# Altium PCB V2_0.PcbDoc
Units mm, origin at the board's own origin, x right, y up, seen from the top; angles counter-clockwise.
Board outline 38.46 x 78.49 mm, 4 copper layers (Top Layer, VCC, GND, Bottom Layer), stack 0.603 mm thick; 21 components, 19 nets, 145 pads, 0 vias.
Unrouted connection lines stored in the file: 49.
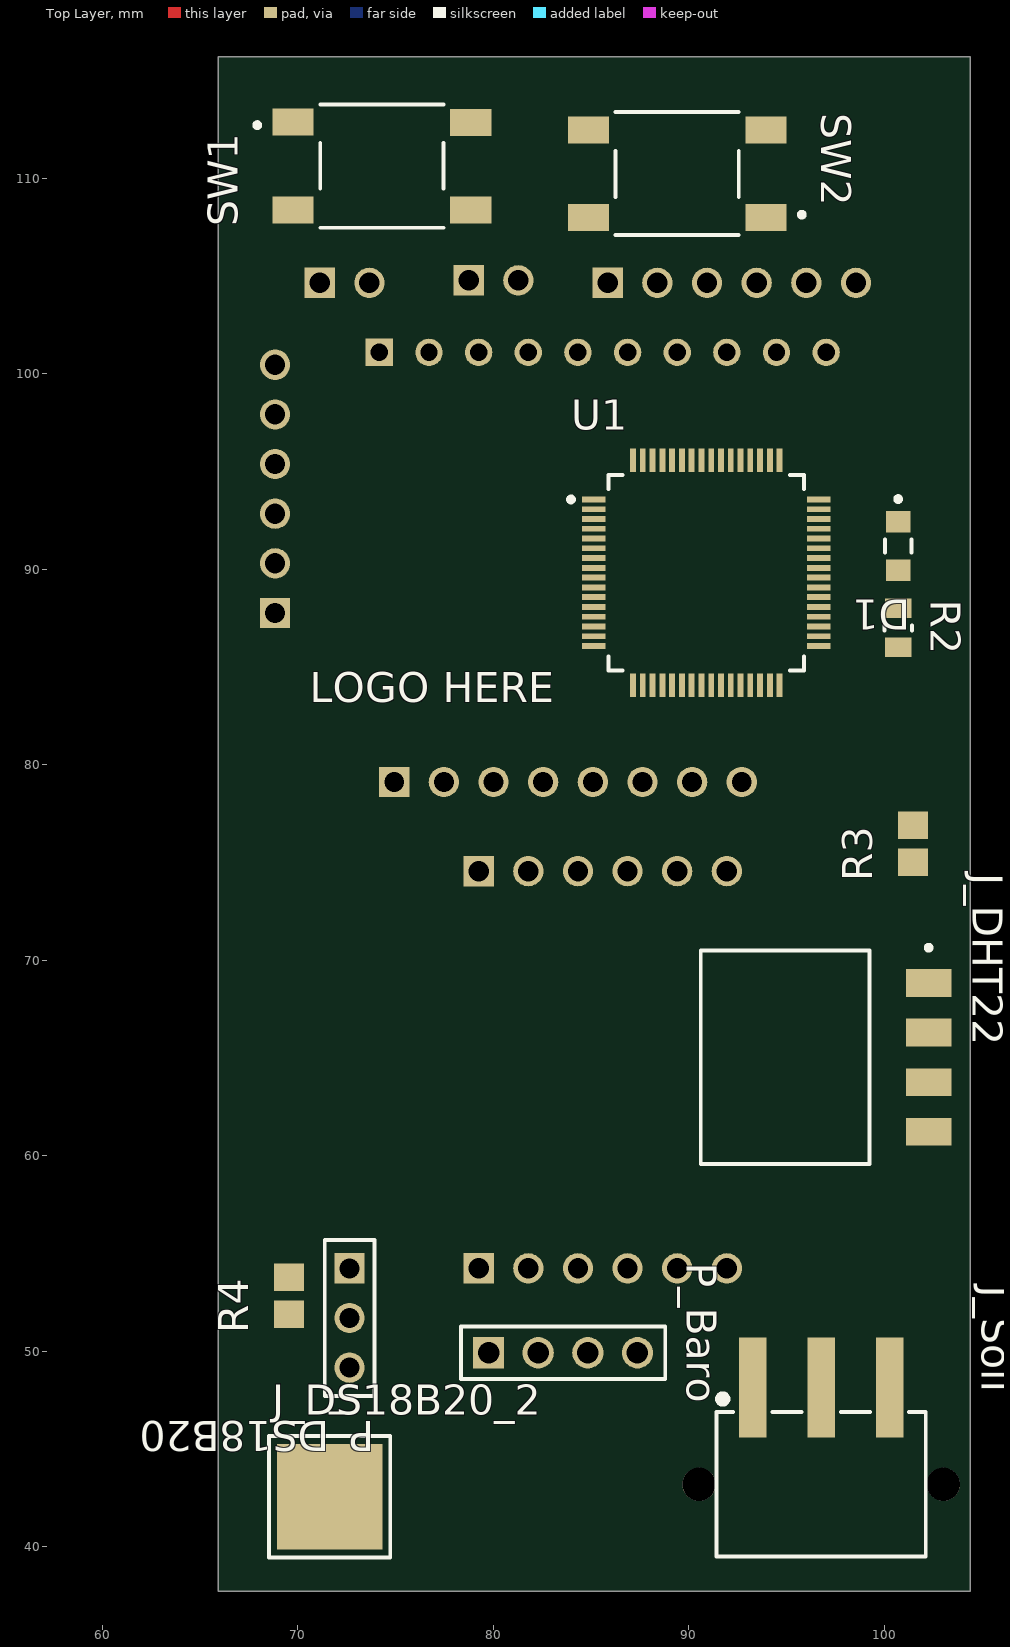
[diagram p0: Top Layer view]
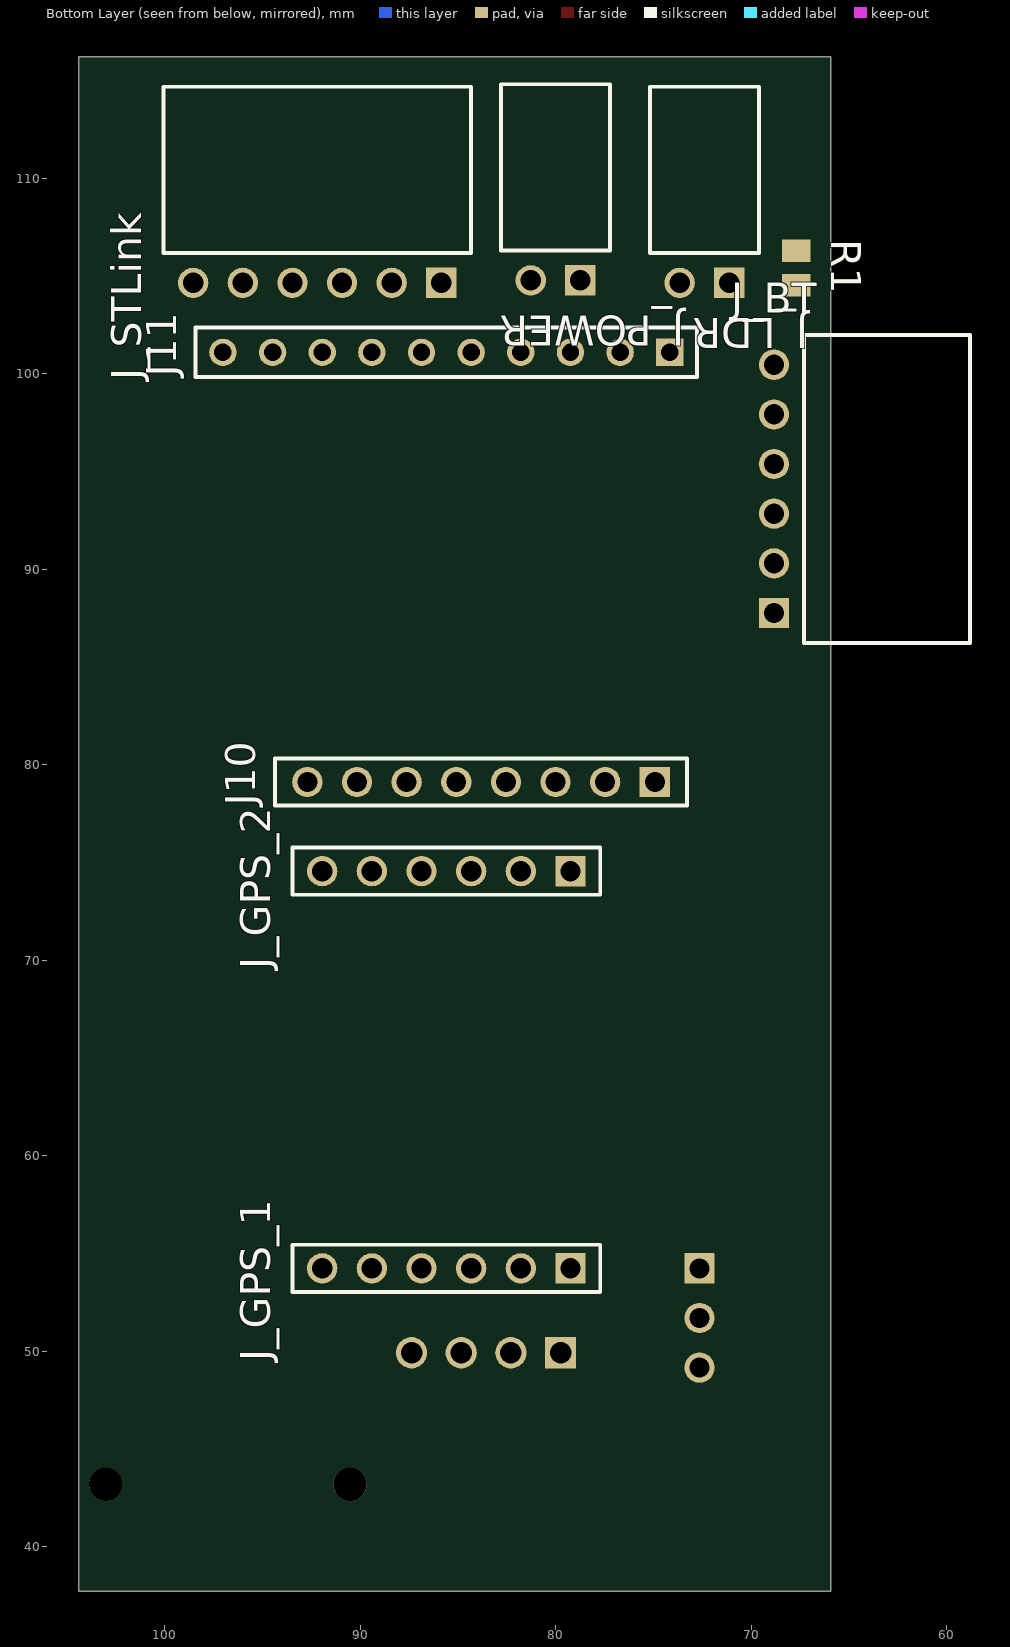
[diagram p1: Bottom Layer view, seen from below]
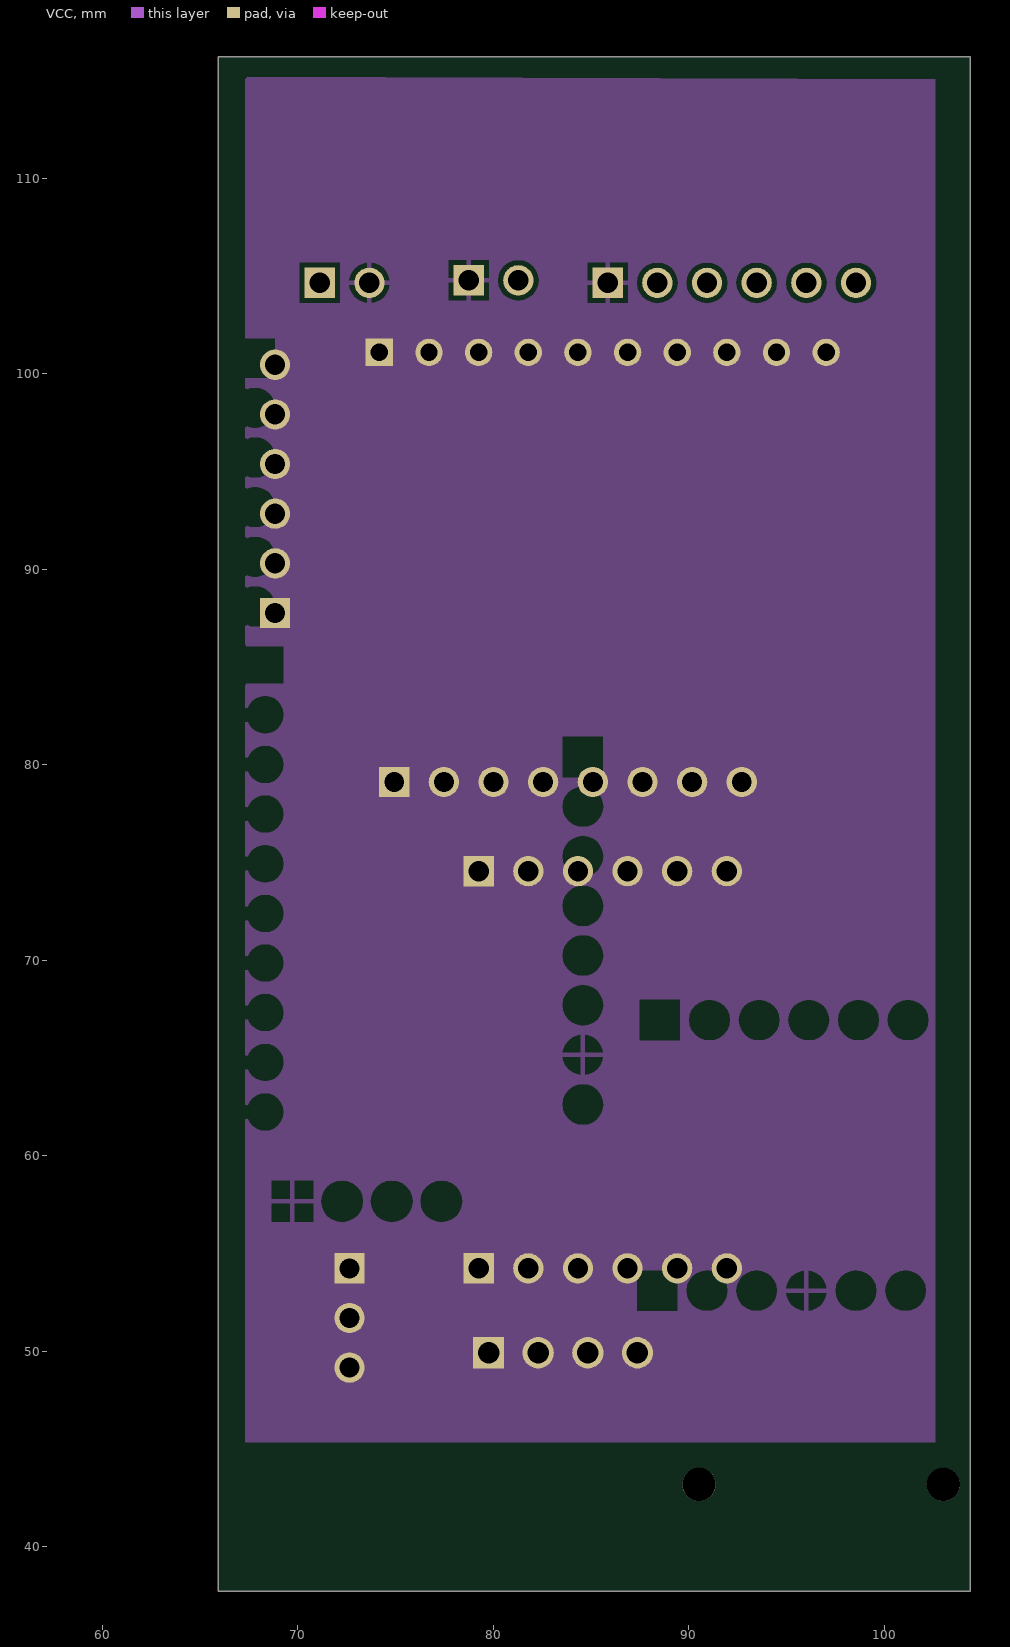
[diagram p2: VCC]
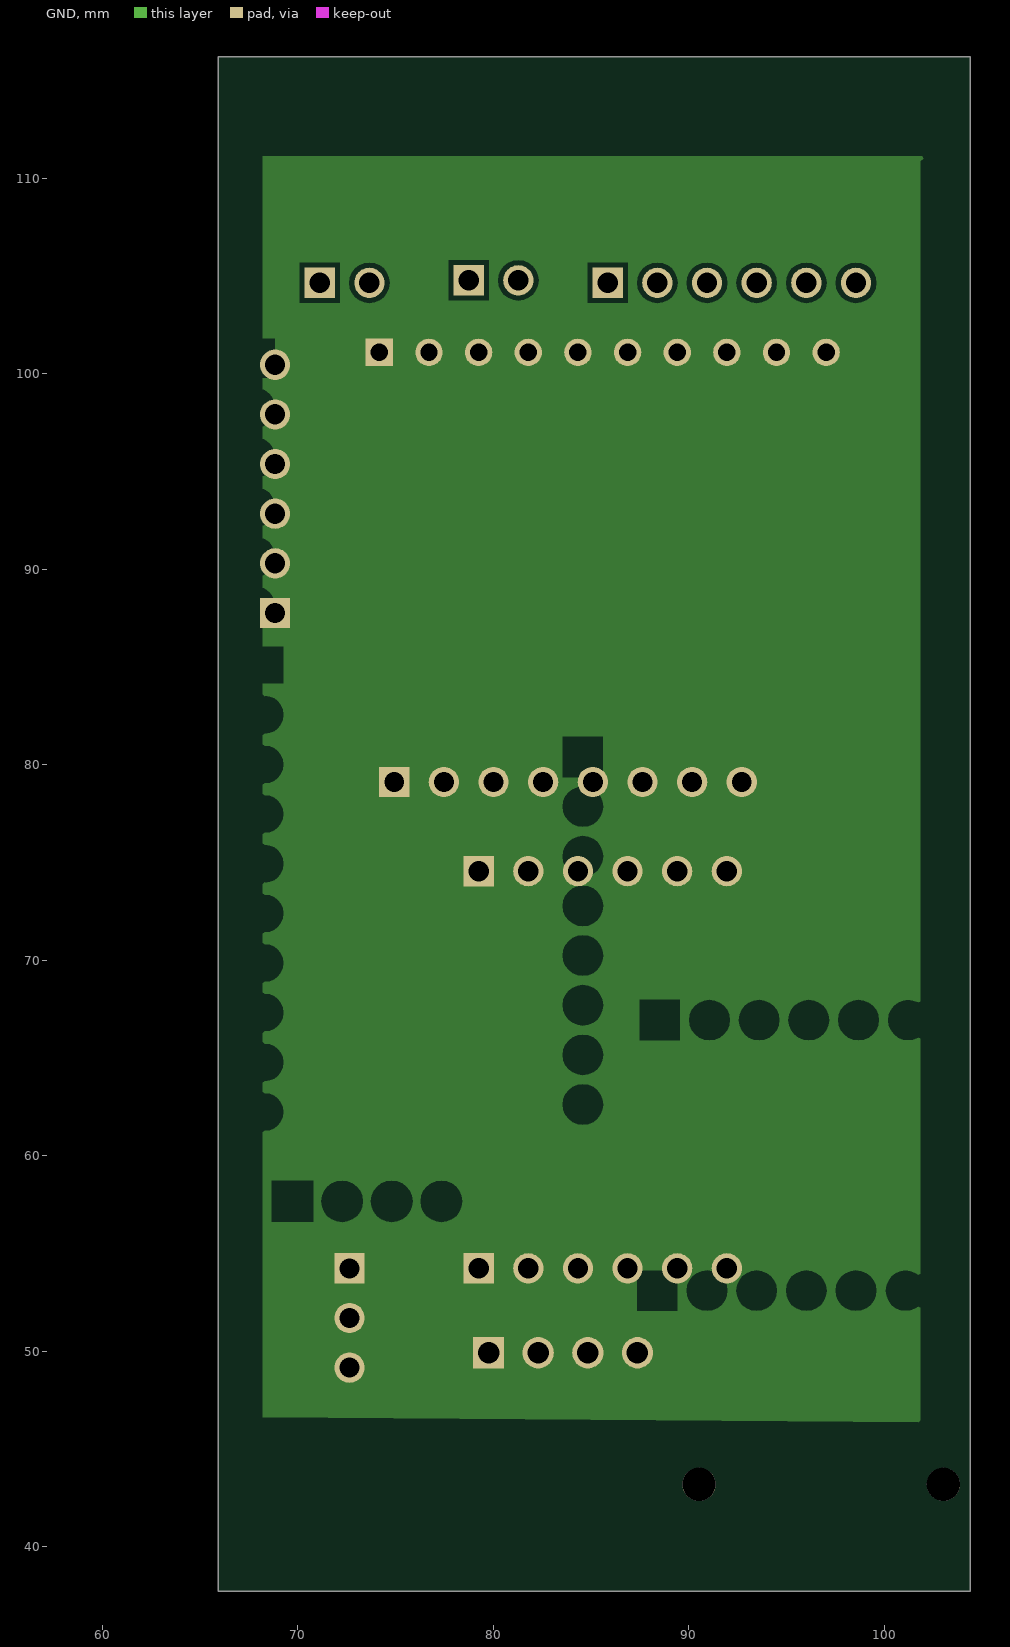
[diagram p3: GND]

## Layer stack, top to bottom
Top Solder: solder mask 0.0102, Solder Resist, Dk 3.5
Top Layer: signal copper 0.0356
Dielectric 2: prepreg 0.0711, PP-006, Dk 4.1
VCC: signal copper 0.035
Dielectric 1: dielectric 0.32, FR-4, Dk 4.8
GND: signal copper 0.035
Dielectric 3: prepreg 0.0711, PP-006, Dk 4.1
Bottom Layer: signal copper 0.0356
Bottom Solder: solder mask 0.0102, Solder Resist, Dk 3.5

## Board outline
104.394,116.205 104.394,37.719 65.939,37.719 65.939,116.205

## Design rules (kind name [scope] priority, off if disabled: settings)
Clearance [All] p1: gap=0.254 ignorepadtopadclearanceinfootprint=TRUE except(0: Arc-Hole Track-Hole SMDPad-Hole THPad-Hole Via-Hole Fill-Hole Poly-Hole Region-Hole Text-Hole)
PolygonConnect [All] p1: connectstyle=Relief reliefconductorwidth=0.254 reliefentries=4 polygonreliefangle="90 Angle" airgapwidth=0.254
RoomDefinition V2_0 [InComponentClass('V2_0')] p1 off: confinementstyle=ConfineIn formatcopy=TRUE lockcomponents=FALSE outline 62.23,38.608 22.098,38.608 22.098,66.802 62.23,66.802
RoutingVias [All] p1: holewidth=0.711 width=1.27 viastyle="Through Hole" minholewidth=0.711 minwidth=1.27 maxholewidth=0.711 maxwidth=1.27
SolderMaskExpansion [All] p1: expansion=0.102 istentingtop=FALSE
Width [All] p1: maxlimit=0.254 minlimit=0.254 preferedwidth=0.254
30 further rules are at their usual default settings.

## Components (designator, comment, footprint, x,y, rotation, side; value= is the part's Value field where it differs from the comment)
D1 "LTST-C171KGKT" FP-LTST-C171KGKT-MFG 100.711,91.186 r270 top
J10 "SSQ-108-01-T-S" SMTC-SSQ-108-01-X-S 74.93,79.11 r0 bottom
J11 "BCS-110-F-S-TE" SMTC-BCS-110-X-S-TE 74.168,101.092 r0 bottom
J_BT "SSW-106-02-G-S-RA" SMTC-SSW-106-02-X-S-RA 68.834,87.757 r90 bottom
J_DHT22 "SMH-104-02-G-S" FP-SMH-104-02-G-S-MFG 94.996,65.024 r270 top
J_DS18B20_2 "S8111-46R" FP-S8111-46R-MFG 71.628,42.545 r90 top
J_GPS_1 "SSW-106-02-T-S" SMTC-SSW-106-02-X-S 79.248,54.229 r0 bottom
J_GPS_2 "SSW-106-02-T-S" SMTC-SSW-106-02-X-S 79.248,74.549 r0 bottom
J_LDR "SSW-102-02-G-S-RA" SMTC-SSW-102-02-X-S-RA 71.12,104.648 r0 bottom
J_POWER "SSW-102-02-G-S-RA" SMTC-SSW-102-02-X-S-RA 78.74,104.775 r0 bottom
J_Soil "691508110303" 691508110303 96.774,43.18 r0 top
J_STLink "SSW-106-02-G-S-RA" SMTC-SSW-106-02-X-S-RA 85.852,104.648 r0 bottom
P_Baro "61300411121" 61300411121 83.566,49.911 r0 top
P_DS18B20 "TSW-103-07-G-S" SMTC-TSW-103-07-X-S 72.644,54.229 r270 top
R1 "ERJ6ENF2200V" RESC2013X70X40NL20T20 67.691,105.41 r270 bottom
R2 "RP73PF2A499RBTDF" FP-RP73P-2A-MFG 100.711,86.995 r270 top value=499Ω
R3 "ERA6AEB472V" RESC2013X60X40ML20T25 101.473,75.946 r90 top
R4 "ERA6AEB472V" RESC2013X60X40ML20T25 69.545,52.832 r90 top
SW1 "FSM2JSMAA" FP-FSM2JSMAA-MFG 74.295,110.617 r90 top
SW2 "FSM2JSMAA" FP-FSM2JSMAA-MFG 89.408,110.236 r270 top
U1 "STM32L073RZT6" FP-LQFP64-5W-MFG 90.897,89.817 r0 top

## Footprints (in the part's own frame and the unit in brackets; to place one, negate y for a bottom-side part, rotate by r counter-clockwise, add the part's x,y. Pads: shape width x height; smd on the part's side, far side on the other; paste and mask are expansions set on the pad)
61300411121 [mm] "Pin Header, pitch 2.54 mm, THT, Vertical, single row, 4p"
  rect 1.6x1.6 hole 1.1: 1(-3.81,0)
  round 1.6 hole 1.1: 2(-1.27,0) 3(1.27,0) 4(3.81,0)
  silkscreen extent -5.23,-1.35 5.23,1.35, body extent -5.08,-1.27 5.08,1.27, height 8.57
691508110303 [mm] "WR-TBL Terminal block - serie 5081 3,50mm - SMT - Horizontal entry with rising clamp - 03p"
  rect 1.4x5.1 smd: 1(-3.5,4.95) 2(0,4.95) 3(3.5,4.95)
  round 1.7 hole 1.7 unplated: M1(-6.25,0) M2(6.25,0)
  silkscreen extent -5.35,-3.7 5.35,4.51, body extent -6.92,-3.7 6.92,7.2, height 11.25
FP-FSM2JSMAA-MFG [mm]
  rect 1.38x2.1 smd paste+0 mask+0: 1(2.25,4.55) 2(2.24,-4.55) 3(-2.24,4.55) 4(-2.24,-4.55)
  silkscreen extent -3.15,-3.15 3.15,6.5, body extent -3.25,-5.7 3.25,5.7, height 0.25
FP-LQFP64-5W-MFG [mm]
  rect 1.2x0.3 smd paste+0 mask+0: 1(-5.75,3.75) 2(-5.75,3.25) 3(-5.75,2.75) 4(-5.75,2.25) 5(-5.75,1.75) 6(-5.75,1.25) 7(-5.75,0.75) 8(-5.75,0.25) 9(-5.75,-0.25) 10(-5.75,-0.75) 11(-5.75,-1.25) 12(-5.75,-1.75) 13(-5.75,-2.25) 14(-5.75,-2.75) 15(-5.75,-3.25) 16(-5.75,-3.75) 33(5.75,-3.75) 34(5.75,-3.25) 35(5.75,-2.75) 36(5.75,-2.25) 37(5.75,-1.75) 38(5.75,-1.25) 39(5.75,-0.75) 40(5.75,-0.25) 41(5.75,0.25) 42(5.75,0.75) 43(5.75,1.25) 44(5.75,1.75) 45(5.75,2.25) 46(5.75,2.75) 47(5.75,3.25) 48(5.75,3.75)
  rect 0.3x1.2 smd paste+0 mask+0: 17(-3.75,-5.75) 18(-3.25,-5.75) 19(-2.75,-5.75) 20(-2.25,-5.75) 21(-1.75,-5.75) 22(-1.25,-5.75) 23(-0.75,-5.75) 24(-0.25,-5.75) 25(0.25,-5.75) 26(0.75,-5.75) 27(1.25,-5.75) 28(1.75,-5.75) 29(2.25,-5.75) 30(2.75,-5.75) 31(3.25,-5.75) 32(3.75,-5.75) 49(3.75,5.75) 50(3.25,5.75) 51(2.75,5.75) 52(2.25,5.75) 53(1.75,5.75) 54(1.25,5.75) 55(0.75,5.75) 56(0.25,5.75) 57(-0.25,5.75) 58(-0.75,5.75) 59(-1.25,5.75) 60(-1.75,5.75) 61(-2.25,5.75) 62(-2.75,5.75) 63(-3.25,5.75) 64(-3.75,5.75)
  silkscreen extent -7.05,-5 5,5, body extent -6.45,-6.45 6.45,6.45, height 0.25
FP-LTST-C171KGKT-MFG [mm]
  rect 1.1x1.25 smd paste+0 mask+0: 1(-1.25,0) 2(1.25,0)
  silkscreen extent -2.52,-0.67 0.33,0.67, body extent -1.9,-0.77 1.9,0.77, height 0.25
FP-RP73P-2A-MFG [mm]
  rect 1x1.35 smd paste+0 mask+0: 1(-1,0) 2(1,0)
  silkscreen extent -0.13,-0.7 0.13,0.7, body extent -1.6,-0.8 1.6,0.8, height 0.25
FP-S8111-46R-MFG [mm]
  rect 5.4x5.4 smd paste+0 mask+0: 1(0,0)
  silkscreen extent -3.1,-3.1 3.1,3.1, body extent -2.8,-2.8 2.8,2.8, height 0.25
FP-SMH-104-02-G-S-MFG [mm]
  rect 1.42x2.34 smd paste+0 mask+0: 1(-3.81,7.275) 2(-1.27,7.275) 3(1.27,7.275) 4(3.81,7.275)
  silkscreen extent -5.73,-4.39 5.46,7.4, body extent -5.33,-4.25 5.33,7.68, height 2.54
RESC2013X60X40ML20T25 [mm] "Chip Resistor, 2-Leads, Body 2.00x1.25mm, IPC Low Density"
  rect 1.4x1.55 smd: 1(-0.95,0) 2(0.95,0)
  body extent -1.1,-0.72 1.1,0.72, height 0.6
RESC2013X70X40NL20T20 [mm] "Chip Resistor, 2-Leads, Body 2.00x1.25mm, IPC Medium Density"
  rect 1.15x1.45 smd: 1(-0.875,0) 2(0.875,0)
  body extent -1.1,-0.72 1.1,0.72, height 0.7
SMTC-BCS-110-X-S-TE [mm] "Box Connector Socket Strip, 1x10 Pins, Vertical, 2.54mm Pitch, Female"
  rect 1.4x1.4 hole 0.89: 1(0,0)
  round 1.4 hole 0.89: 2(2.54,0) 3(5.08,0) 4(7.62,0) 5(10.16,0) 6(12.7,0) 7(15.24,0) 8(17.78,0) 9(20.32,0) 10(22.86,0)
  silkscreen extent -1.4,-1.27 24.26,1.27, body extent -1.27,-1.27 24.13,1.27, height 7.37
SMTC-SSQ-108-01-X-S [mm] "SQ Post Socket, 1x8 Pins, Vertical, 2.54mm Pitch, Female"
  rect 1.55x1.55 hole 1.02: 1(0,0)
  round 1.55 hole 1.02: 2(2.54,0) 3(5.08,0) 4(7.62,0) 5(10.16,0) 6(12.7,0) 7(15.24,0) 8(17.78,0)
  silkscreen extent -1.65,-1.2 19.43,1.2, body extent -1.52,-1.21 19.3,1.21, height 8.51
SMTC-SSW-102-02-X-S-RA [mm] "SQ Post Socket, 1x2 Pins, Right Angle, 2.54mm Pitch, Female"
  rect 1.55x1.55 hole 1.04: 1(0,0)
  round 1.55 hole 1.04: 2(2.54,0)
  silkscreen extent -1.53,-10.03 4.07,-1.52, body extent -1.52,-10.03 4.06,0.2, height 2.41
SMTC-SSW-106-02-X-S [mm] "SQ Post Socket, 1x6 Pins, Vertical, 2.54mm Pitch, Female"
  rect 1.55x1.55 hole 1.04: 1(0,0)
  round 1.55 hole 1.04: 2(2.54,0) 3(5.08,0) 4(7.62,0) 5(10.16,0) 6(12.7,0)
  silkscreen extent -1.53,-1.2 14.23,1.2, body extent -1.52,-1.21 14.22,1.21, height 8.51
SMTC-SSW-106-02-X-S-RA [mm] "SQ Post Socket, 1x6 Pins, Right Angle, 2.54mm Pitch, Female"
  rect 1.55x1.55 hole 1.04: 1(0,0)
  round 1.55 hole 1.04: 2(2.54,0) 3(5.08,0) 4(7.62,0) 5(10.16,0) 6(12.7,0)
  silkscreen extent -1.53,-10.03 14.23,-1.52, body extent -1.52,-10.03 14.22,0.2, height 2.41
SMTC-TSW-103-07-X-S [mm] ".025 SQ Post Terminal Strip Assembly, 1x3 Pins, Vertical, 2.54mm Pitch, Male"
  rect 1.55x1.55 hole 1.02: 1(0,0)
  round 1.55 hole 1.02: 2(2.54,0) 3(5.08,0)
  silkscreen extent -1.46,-1.27 6.54,1.27, body extent -1.27,-1.27 6.35,1.27, height 8.38

## Part data
D1: library part CMP-22017-000037-1, "LED GREEN CLEAR SMD", Case Code (Imperial)=0805, Case Code (Metric)=2012, Color=Green, Forward Current=30mA, Forward Voltage=2.4V, Lens Color=Colorless, Max Operating Temperature=85°C, Min Operating Temperature=-55°C, Package Quantity=1, Power Dissipation=75mW, Reverse Voltage=5V, Test Current=20mA, Case/Package=0805, Depth=1.25mm, Dominant Wavelength=571nm, HEIGHT=0.8mm, Illumination Color=Green, Lead Free="Lead Free", Length=2mm, Lens Style=Rectangular, Lens Transparency=Clear, Luminous Intensity=35mcd, Mount="Surface Mount", Number of Elements=1, Number of LEDs=1, Number of Pins=2, Packaging="Tape and Reel", Power Rating=75mW, Radiation Hardening=No, Viewing Angle=130°, Wavelength=574nm, Width=1.25mm
J10: library part CMP-1023-00293-1, "SQ Post Socket, Through-hole, Vertical, -55 to 105 degC, 2.54 mm Pitch, 8-Pin, Female, RoHS", Manufacturer=Samtec, Temperature Range="-55 to 105 degC", ComponentLink1Description="Manufacturer URL", ComponentLink1URL=http://www.samtec.com, ComponentLink2Description=Datasheet, ComponentLink2URL=http://www.samtec.com/documents/webfiles/pdf/SSQ_TH.PDF, ComponentLink3Description="Package Specification", ComponentLink3URL=http://www.samtec.com/documents/webfiles/cpdf/SSQ-1XX-XX-XXX-X-XX-XXX-XX-X-MKT.pdf, DatasheetVersion=F-214, Mounting Technology=Through-hole, Orientation=Vertical, PackageDescription="Assembly, Socket Strip .025[0.64] SQ Tail", PackageReference=SSQ-108-01-X-S, PackageVersion="BD, 6/1987", PartNumber=SSQ-108-01-T-S, Pitch="2.54 mm", RoHS=True
J11: library part CMP-1023-00017-1, "Tiger Claw(TM) Pass-Through Socket, Vertical, -55 to 125 degC, 2.54 mm Pitch, 10-Pin, Female, RoHS", Manufacturer=Samtec, Temperature Range="-55 to 125 degC", ComponentLink1Description="Manufacturer URL", ComponentLink1URL=http://www.samtec.com, ComponentLink2Description=Datasheet, ComponentLink2URL=http://www.samtec.com/documents/webfiles/pdf/BCS.PDF, ComponentLink3Description="Package Specification", ComponentLink3URL=http://www.samtec.com/documents/webfiles/cpdf/BCS-1XX-XXX-X-XX-XXX-MKT.pdf, DatasheetVersion=F-214, Mounting Technology=Through-hole, Orientation=Vertical, PackageDescription="Box Connector Socket Strip", PackageReference=BCS-110-X-S-TE, PackageVersion="BV, 9/1991", PartNumber=BCS-110-F-S-TE, Pitch="2.54 mm", RoHS=True
J_BT J_STLink: library part CMP-1023-00363-1, "SQ Post Socket, Through-hole, Right Angle, -55 to 125 degC, 2.54mm Pitch, 6-Pin, Female, RoHS", Manufacturer=Samtec, Temperature Range="-55 to 125 degC", ComponentLink1Description="Manufacturer URL", ComponentLink1URL=http://www.samtec.com, ComponentLink2Description=Datasheet, ComponentLink2URL=http://www.samtec.com/documents/webfiles/pdf/SSW_TH.PDF, ComponentLink3Description="Package Specification", ComponentLink3URL=http://www.samtec.com/documents/webfiles/cpdf/SSW-1XX-XX-XXX-X-XX-XXX-XX-MKT.pdf, DatasheetVersion=F-214, Mounting Technology=Through-hole, Orientation="Right Angle", PackageDescription="Assembly, Socket Strip .016 X .031 Tail", PackageReference=SSW-106-02-X-S-RA, PackageVersion="CA, 6/1987", PartNumber=SSW-106-02-G-S-RA, Pitch="2.54 mm", RoHS=True
J_DHT22: library part CMP-02766-000076-1, "CONN RCPT 4POS 0.1 GOLD SMD R/A", Manufacturer=Samtec, Temperature="-55°C to +125°C", Temperature Range High=+125°C, Temperature Range Low=-55°C, Automotive=No, Category=Conn, ComponentLink2Description=Datasheet, ComponentLink2URL=http://suddendocs.samtec.com/prints/smh-1xx-xx-xx-x-xx-mkt.pdf, Conn Gender=Female, Conn Orientation="Right Angle", Contact Material=Gold,Nickel, Device Class L1=Connectors, Device Class L2="Headers and Wire Housings", Device Class L3=unset, Digikey Description="CONN RCPT 4POS 0.1 GOLD SMD R/A", Footprint Url=http://suddendocs.samtec.com/prints/smh-1xx-xx-x-x-xx-footprint.pdf, HEIGHT=2.54mm, Is Female=yes, Lead Free=Yes, Manufacturer Part Number=SMH-104-02-G-S, Number Of Contacts=4, Number Of Rows=1, Octopart=https://octopart.com/smh-104-02-g-s-samtec-12561290, PACKAGE=SMH-104-02-G-S, Pitch=2.54mm, RoHS=TRUE
J_DS18B20_2: library part CMP-15817-000008-1, "CBL CLIP C-TYPE SILVER SOLDER", Color=Silver, Package Quantity=1500, Wire/Cable Color=Grey, Depth=5mm, HEIGHT=0.081inch, Length=5mm, Material=Bronze, Material Thickness=0.008inch, Mount=Solder, Orientation=Straight, Packaging="Tape and Reel", Radiation Hardening=No, REACH SVHC="No SVHC", Width=5mm
J_GPS_1 J_GPS_2: library part CMP-1023-00360-1, "SQ Post Socket, Through-hole, Vertical, -55 to 105 degC, 2.54mm Pitch, 6-Pin, Female, RoHS", Manufacturer=Samtec, Temperature Range="-55 to 105 degC", ComponentLink1Description="Manufacturer URL", ComponentLink1URL=http://www.samtec.com, ComponentLink2Description=Datasheet, ComponentLink2URL=http://www.samtec.com/documents/webfiles/pdf/SSW_TH.PDF, ComponentLink3Description="Package Specification", ComponentLink3URL=http://www.samtec.com/documents/webfiles/cpdf/SSW-1XX-XX-XXX-X-XX-XXX-XX-MKT.pdf, DatasheetVersion=F-214, Mounting Technology=Through-hole, Orientation=Vertical, PackageDescription="Assembly, Socket Strip .016 X .031 Tail", PackageReference=SSW-106-02-X-S, PackageVersion="CA, 6/1987", PartNumber=SSW-106-02-T-S, Pitch="2.54 mm", RoHS=True
J_LDR J_POWER: library part CMP-1023-00325-1, "SQ Post Socket, Through-hole, Right Angle, -55 to 125 degC, 2.54 mm Pitch, 2-Pin, Female, RoHS", Manufacturer=Samtec, Temperature Range="-55 to 125 degC", ComponentLink1Description="Manufacturer URL", ComponentLink1URL=http://www.samtec.com, ComponentLink2Description=Datasheet, ComponentLink2URL=http://www.samtec.com/documents/webfiles/pdf/SSW_TH.PDF, ComponentLink3Description="Package Specification", ComponentLink3URL=http://www.samtec.com/documents/webfiles/cpdf/SSW-1XX-XX-XXX-X-XX-XXX-XX-MKT.pdf, DatasheetVersion=F-214, Mounting Technology=Through-hole, Orientation="Right Angle", PackageDescription="Assembly, Socket Strip .016 X .031 Tail", PackageReference=SSW-102-02-X-S-RA, PackageVersion="CA, 6/1987", PartNumber=SSW-102-02-G-S-RA, Pitch="2.54 mm", RoHS=True
J_Soil: library part CMP-1502-02491-1, "Serie 5081 - 3.50 mm Horizontal Entry SMT with Rising Cage Clamp WR-TBL, 3 pin", Manufacturer="Wurth Elektronik", Operating Temperature=-40to130degC, Datasheet URL=http://katalog.we-online.de/em/datasheet/6915081103xx.pdf, Manufacturer URL=http://www.we-online.de, Mounting Technology=SMT, Package Reference=691508110303, Packaging=TapeandReelwithCap, Part Number=691508110303, Pin Number=3, Pitch=3.50mm, Publisher=WurthElektronik
P_Baro: library part CMP-1502-01064-1, "THT Vertical Pin Header WR-PHD, Pitch 2.54 mm, Single Row, 4 pins", Contact Resistance=20mOhm, Manufacturer="Wurth Elektronik", Operating Temperature=-40to105degC, Rated Current=3A, Withstanding Voltage=500VAC, Working Voltage=250VAC, Datasheet URL=https://katalog.we-online.de/em/datasheet/6130xx11121.pdf, Gender=Male, Manufacturer URL=http://www.we-online.de, Mounting Technology=THT, Orientation=Vertical, Package Reference=61300411121, Packaging=Bag, Part Number=61300411121, Pin Number=4, Pitch=2.54mm, Publisher=WurthElektronik, Row Number=Single
P_DS18B20: library part CMP-1024-00333-1, "0.025\" SQ Post Header, Through-hole, Vertical, -55 to 125 degC, 2.54 mm Pitch, 3-Pin, Male, RoHS", Manufacturer=Samtec, Temperature Range="-55 to 125 degC", ComponentLink1Description="Manufacturer URL", ComponentLink1URL=http://www.samtec.com, ComponentLink2Description=Datasheet, ComponentLink2URL=http://www.samtec.com/documents/webfiles/pdf/TSW_TH.PDF, ComponentLink3Description="Package Specification", ComponentLink3URL=http://www.samtec.com/documents/webfiles/cpdf/TSW-XXX-XX-XXX-X-XX-XXX-MKT.pdf, DatasheetVersion=F-214, Mounting Technology=Through-hole, Orientation=Vertical, PackageDescription=".025[0.64] SQ. Post Terminal Strip Assembly", PackageReference=TSW-103-07-X-S, PackageVersion="DM, 8/1988", PartNumber=TSW-103-07-G-S, Pitch="2.54 mm", RoHS=True
R1: library part CMP-2001-00044-1, Manufacturer=Panasonic, Part Number=ERJ6ENF2200V
R2: library part CMP-03211-004360-1, "RP73P 0805 499Ω 0.25W 25ppm/°C 0.10% 150V", Manufacturer="TE Connectivity", PACKAGE=RP73P-2A, Power Rating=0.25W, Resistance=499Ω, Temperature="-55°C to +155°C", Temperature Coefficient=25ppm/°C, Temperature Range High=+155°C, Temperature Range Low=-55°C, Tolerance=0.001, Voltage Rating=150V, Automotive=No, Category=Res, ComponentLink2Description=Datasheet, ComponentLink2URL=https://www.te.com/commerce/DocumentDelivery/DDEController?Action=srchrtrv&DocNm=1773272&DocType=DS&DocLang=English, Composition="Thin Film", Device Class L1="Passive Components", Device Class L2=Resistors, Device Class L3="Chip SMD Resistors", HEIGHT=0.65mm, Ipc Land Pattern Name=RESC200125X55, Lead Free=Yes, Manufacturer Part Number=RP73PF2A499RBTDF, Octopart=https://octopart.com/rp73pf2a499rbtdf-te+connectivity-45466959, RoHS=TRUE, Series=RP73P
R3 R4: library part CMP-2001-00644-1, Manufacturer=Panasonic, Part Number=ERA6AEB472V
SW1 SW2: library part CMP-03402-000003-1, "SWITCH TACTILE SPST-NO 0.05A 24V", Contact Current Rating=50mA, Contact Resistance=100mΩ, Manufacturer="TE Connectivity", Operating Force=260gf, PACKAGE=0, Temperature="-35°C to +85°C", Temperature Range High=+85°C, Temperature Range Low=-35°C, Voltage Rating DC=24V, Automotive=No, Category=Switch, ComponentLink2Description=Datasheet, ComponentLink2URL=https://www.te.com/commerce/DocumentDelivery/DDEController?Action=showdoc&DocId=Customer+Drawing%7F2-1437565-7%7FV%7Fpdf%7FEnglish%7FENG_CD_2-1437565-7_V.pdf%7F2-1437565-8, Device Class L1=Electromechanical, Device Class L2=Switches, Device Class L3="Pushbutton Switches", Digikey Description="SWITCH TACTILE SPST-NO 0.05A 24V", Electromechanical Life=100000Cycles, HEIGHT=4.59mm, Lead Free=Yes, Manufacturer Part Number=FSM2JSMAA, Mount="Surface Mount", Mouser Description="Tactile Switches TACTILE 260G FORCE S", Octopart=https://octopart.com/fsm2jsmaa-te+connectivity-41720620, RoHS=TRUE, Standoff Height=0.05mm, Throw Configuration=SPST-NO
U1: library part CMP-12105-000144-1, "IC MCU 32BIT 192KB FLASH 64LQFP", Case/Package=LQFP, Frequency=32MHz, Max Operating Temperature=85°C, Max Supply Voltage=3.6V, Min Operating Temperature=-40°C, Min Supply Voltage=1.65V, Core Architecture=ARM, Interface=I2C, Memory Size=192KB, Memory Type=FLASH, Number of I/Os=51, Number of Pins=64, Oscillator Type=Internal, Packaging=Tray, Peripherals="Brown-out Detect/Reset", RAM Size=20KB, REACH SVHC="No SVHC", RoHS Compliant=Yes

## Nets (pads, with @x,y where several pads share a name; then routed paths per layer and width w, separated by ;. In a path a pad name is that pad's centre, name@x,y a point inside that pad or via, vN(x,y) a via of type N, cw(c..) or ccw(c..) an arc to the next point about the centre after c; other vN are vias at no path point)
BT_RX: U1.51
BT_TX: U1.15
BUTTON_USER: SW1.3 SW1.4 U1.2
GND: D1.1 J10.8 J_DHT22.4 J_GPS_2.6 J_POWER.2 J_Soil.2 J_STLink.6 P_Baro.2 P_DS18B20.3 R1.1 SW1.1 SW1.2 SW2.1 SW2.2 U1.12 U1.18 U1.31 U1.47 U1.60 U1.63
GPS_RX: J_GPS_2.3 U1.42
GPS_TX: J_GPS_2.2 U1.43
LED: R2.2 U1.21
NetD1_2: D1.2 R2.1
NRST: J_STLink.5 SW2.3 SW2.4 U1.7
PA0_LDR: J_LDR.1 R1.2 U1.14
PC1_DHT: J_DHT22.2 R3.1 U1.9
PC2_DS18B20: P_DS18B20.2 R4.1 U1.10
PC3_SOIL: J_Soil.1 U1.11
SCL_BARO: P_Baro.3 U1.58
SDA_BARO: P_Baro.4 U1.59
SWCLK_STLINK: J_STLink.2 U1.49
SWDIO_STLINK: J_STLink.3 U1.46
SWO_STLINK: J_STLink.4 U1.55
VCC: J10.7 J_DHT22.1 J_GPS_2.4 J_LDR.2 J_POWER.1 J_Soil.3 J_STLink.1 P_Baro.1 P_DS18B20.1 R3.2 R4.2 U1.13 U1.19 U1.32 U1.48 U1.64
pads on no net: J10.1 J10.2 J10.3 J10.4 J10.5 J10.6 J11.1 J11.2 J11.3 J11.4 J11.5 J11.6 J11.7 J11.8 J11.9 J11.10 J_BT.1 J_BT.2 J_BT.3 J_BT.4 J_BT.5 J_BT.6 J_DHT22.3 J_DS18B20_2.1 J_GPS_1.1 J_GPS_1.2 J_GPS_1.3 J_GPS_1.4 J_GPS_1.5 J_GPS_1.6 J_GPS_2.1 J_GPS_2.5 J_Soil.M1 J_Soil.M2 U1.1 U1.3 U1.4 U1.5 U1.6 U1.8 U1.16 U1.17 U1.20 U1.22 U1.23 U1.24 U1.25 U1.26 U1.27 U1.28 U1.29 U1.30 U1.33 U1.34 U1.35 U1.36 U1.37 U1.38 U1.39 U1.40 U1.41 U1.44 U1.45 U1.50 U1.52 U1.53 U1.54 U1.56 U1.57 U1.61 U1.62

## Polygon pours and split planes (outlines as drawn)
VCC on VCC "VCC_L02_P001" (solid, pour order 1): 67.437,115.189 67.31,115.062 67.31,45.339 102.616,45.339 102.616,115.062
no net on GND "NONET_L03_P003" (solid, pour order 3): 68.199,46.609 68.199,111.125 102.108,111.125 101.854,110.871 101.854,46.355

## Silkscreen, mask and mechanical layers (free items; w line width, h text height)
Top Overlay:
  text "LOGO HERE" at 70.612,83.185 h1.52